# EAGLE board Training_Board (EAGLE 9.1.1)
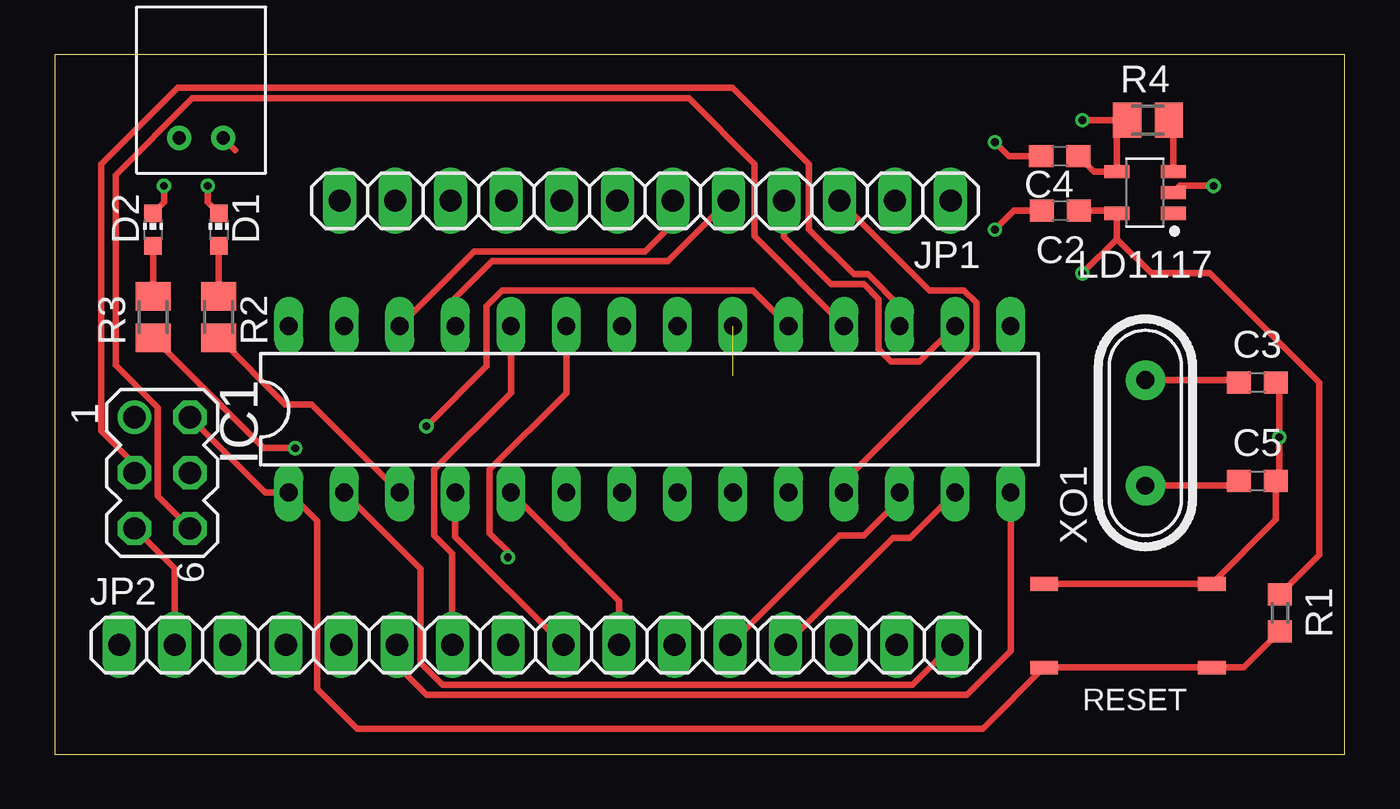
[diagram p0: board, top side]
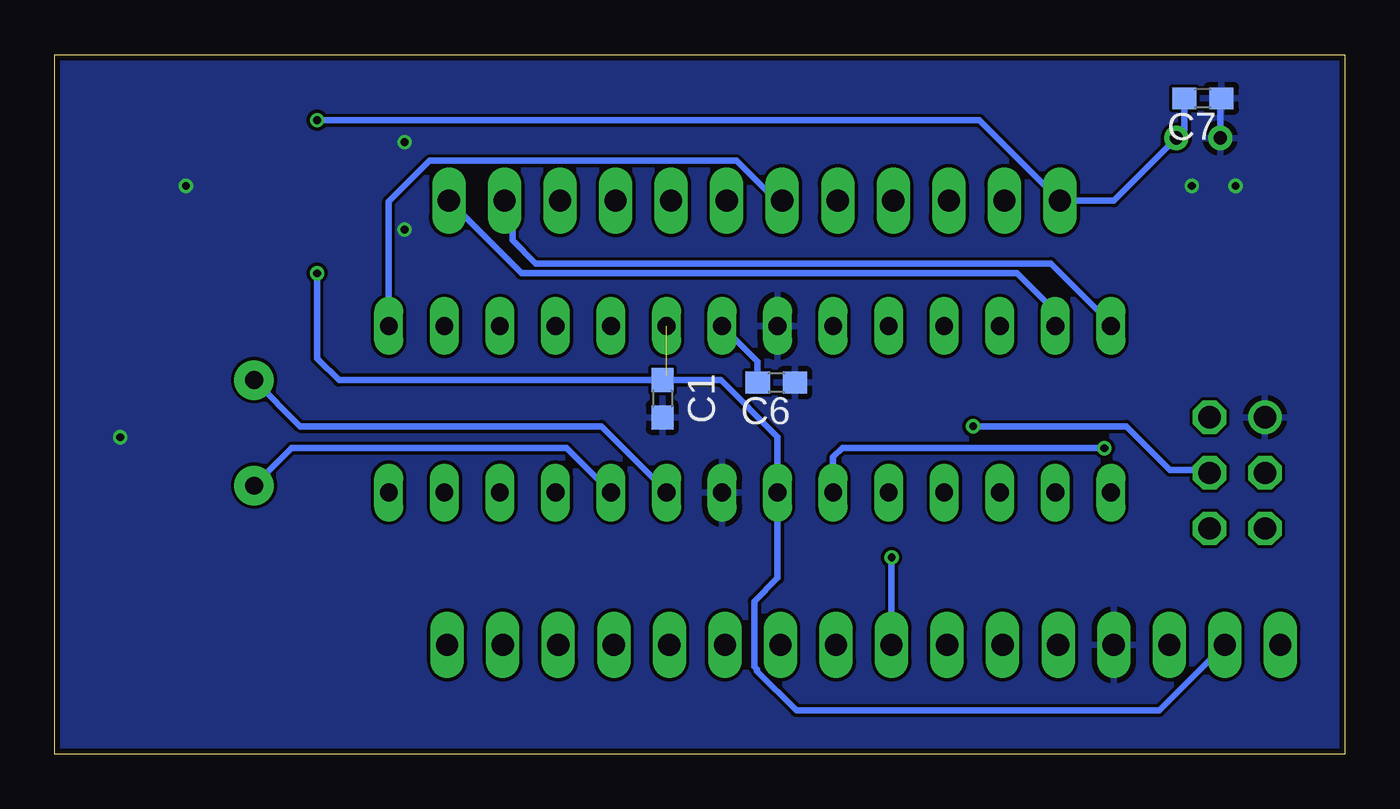
[diagram p1: board, bottom side, seen from below]

Size 59 x 32 mm. Coordinates in mm from the lower left corner, seen from the top.
Outline: 0,0 59,0 59,32 0,32 0,0
Copper layers (1*16): Top 0.035mm / dielectric 1.5mm / Bottom 0.035mm
Design rules "SeeedStudio": minimum track width 6mil, minimum drill 12mil, track to track 6mil, track to pad 6mil, pad to pad 6mil, via to via 6mil, smd to smd 0mil, copper to edge 10mil, drill to drill 10mil, minimum pad ring 10mil, minimum via ring 6mil, stop-mask expansion 2mil, vias tented up to drill 100mil, thermal gap 10mil

## Footprints (pad centres in the part's own frame; a part is rotated, then mirrored left to right if it is on the bottom)
C0603 = smd 1.1 x 1: 1 -0.85,0; 2 0.85,0
CHIP-LED0603 = smd 0.8 x 0.8: A 0,-0.75; C 0,0.75
DIL28-3 = drill 0.813 long: 1 -16.51,-3.81; 2 -13.97,-3.81; 3 -11.43,-3.81; 4 -8.89,-3.81; 5 -6.35,-3.81; 6 -3.81,-3.81; 7 -1.27,-3.81; 8 1.27,-3.81; 9 3.81,-3.81; 10 6.35,-3.81; 11 8.89,-3.81; 12 11.43,-3.81; 13 13.97,-3.81; 14 16.51,-3.81; 15 16.51,3.81; 16 13.97,3.81; 17 11.43,3.81; 18 8.89,3.81; 19 6.35,3.81; 20 3.81,3.81; 21 1.27,3.81; 22 -1.27,3.81; 23 -3.81,3.81; 24 -6.35,3.81; 25 -8.89,3.81; 26 -11.43,3.81; 27 -13.97,3.81; 28 -16.51,3.81
1X12 = drill 1.016 long: 1 -13.97,0; 2 -11.43,0; 3 -8.89,0; 4 -6.35,0; 5 -3.81,0; 6 -1.27,0; 7 1.27,0; 8 3.81,0; 9 6.35,0; 10 8.89,0; 11 11.43,0; 12 13.97,0
1X16 = drill 1.016 long: 1 -19.05,0; 2 -16.51,0; 3 -13.97,0; 4 -11.43,0; 5 -8.89,0; 6 -6.35,0; 7 -3.81,0; 8 -1.27,0; 9 1.27,0; 10 3.81,0; 11 6.35,0; 12 8.89,0; 13 11.43,0; 14 13.97,0; 15 16.51,0; 16 19.05,0
SOT95P285X110-5 = smd 1.146 x 0.597: 1 -1.287,0.95; 2 -1.287,0; 3 -1.287,-0.95; 4 1.287,-0.95; 5 1.287,0.95
MA03-2 = drill 1.016: 1 -2.54,-1.27 | drill 1.016 octagon: 2 -2.54,1.27; 3 0,-1.27; 4 0,1.27; 5 2.54,-1.27; 6 2.54,1.27
R0603 = smd 1 x 1.1: 1 -0.85,0; 2 0.85,0
M0805 = smd 1.3 x 1.6: 1 -0.95,0; 2 0.95,0
PTS645_SMD = smd 1.27 x 0.635: P$1 -3.835,1.917; P$2 3.835,1.917; P$3 3.835,-1.917; P$4 -3.835,-1.917
JST-PH = drill 0.6: 1 -1,0; 2 1,0
HC49 = drill 0.813 pad 1.8: 1 -2.413,0; 2 2.413,0

## Placement (x,y rotation side)
C1  100 nF  [C0603]  31.21,16.26 270 bottom
C2  10uF  [C0603]  45.99,24.86 180 top
C3  22 pF  [C0603]  55,17 0 top
C4  100nF  [C0603]  45.96,27.36 180 top
C5  22 pF  [C0603]  55,12.5 0 top
C6  100 nF  [C0603]  26,17 180 bottom
C7  10 nF  [C0603]  6.5,30 180 bottom
D1  RED  [CHIP-LED0603]  7.5,24 0 top
D2  GREEN  [CHIP-LED0603]  4.5,24 0 top
IC1  ATMEGA328-20P  [DIL28-3]  27.21,15.78 0 top
JP1  [1X12]  27,25.32 180 top
JP2  [1X16]  22,5 0 top
LD1117  AP2112SOT89-5  [SOT95P285X110-5]  49.86,25.69 180 top
PRGRM-HEADER  [MA03-2]  4.92,12.87 270 top
R1  10k Ohm  [R0603]  56.03,6.47 270 top
R2  1k Ohm  [M0805]  7.5,20 90 top
R3  1k Ohm  [M0805]  4.5,20 90 top
R4  10k Ohm  [M0805]  50,29 0 top
S1  PTS645PTS645_SMD1  [PTS645_SMD]  49.08,5.88 0 top
X1  JST-PH2  [JST-PH]  6.7,28.19 0 top
XO1  CRYSTALS-NOGND-HC49/4H  [HC49]  49.88,14.7 90 top

## Library data of the parts
C1 C3 C5-C7 R1 = resistor
C2 C4 = rcl; SPICEPREFIX: C
D1 D2 = led
IC1 = atmega328
JP1 JP2 = pinhead
LD1117 = RoboJackets-PowerICs
PRGRM-HEADER = con-lstb; OC_FARNELL: unknown; OC_NEWARK: unknown
R2-R4 = rcl; SPICEPREFIX: R
S1 = RoboJackets-Switches
X1 = Trainii
XO1 = IQD-Frequency-Products

## Nets
+3V3: C1.1 C2.1 IC1.7 IC1.20 JP2.2 LD1117.5 PRGRM-HEADER.5 R1.1
ECHO_3V3: IC1.13 JP2.13
GND: C1.2 C2.2 C3.2 C4.2 C5.2 C6.1 C7.1 D1.C D2.C IC1.8 IC1.22 JP2.4 LD1117.2 PRGRM-HEADER.1 S1.P$1 S1.P$2 X1.1
LED_1: IC1.3 R2.1
LED_2: IC1.6 R3.1
LEFT_A: IC1.14 JP2.6
LEFT_B: IC1.15 JP1.7
LIFT_A: IC1.16 JP1.4
LIFT_B: IC1.11 JP1.3
LINE_OUT_1: IC1.24 JP2.7
LINE_OUT_2: IC1.23 JP2.8
MISO: IC1.18 PRGRM-HEADER.6
MOSI: IC1.17 PRGRM-HEADER.3
MOTOR_FAULT: IC1.2 JP2.16
N$1: C3.1 IC1.9 XO1.2
N$2: D2.A R3.2
N$3: D1.A R2.2
N$4: C5.1 IC1.10 XO1.1
N$5: LD1117.3 R4.2
N$6: C6.2 IC1.21
RIGHT_A: IC1.26 JP1.6
RIGHT_B: IC1.25 JP1.5
RST: IC1.1 PRGRM-HEADER.2 R1.2 S1.P$3 S1.P$4
SCK: IC1.19 PRGRM-HEADER.4
SCL: IC1.28 JP1.2
SDA: IC1.27 JP1.1
TICK_LEFT: IC1.4 JP2.9
TICK_RIGHT: IC1.5 JP2.10
TRIG_3V3: IC1.12 JP2.12
VBAT: C4.1 C7.2 JP1.12 LD1117.4 R4.1 X1.2

## Tracks (layer width: path | path; a pad name or v marks a point on that pad's centre or on a via)
+3V3  (via drill 0.35)  (1 unrouted)
  Top 0.3: R1.1 57.83,9.12 57.83,16 57.83,17 52.83,22 51,22 50.15,22 48.57,23.57 | PRGRM-HEADER.5 5.49,8.49 JP2.2 | 46.98,25 C2.1 48.45,24.86 LD1117.5 48.57,23.57 | v47,22 48.57,23.57
  Bottom 0.3: 31.02,17.3 C1.1 | C1.1 46,17.11 46.95,18.05 | C1.1 28.54,17.11 25.94,14.51 IC1.7 25.94,8.06 27,7 27,4 26.87,3.87 26.87,3.8 25.08,2 8.49,2 JP2.2 | 47,18.11 46.95,18.05 | 46.95,18.05 47,18.11 | 47,18.11 v47,22
ECHO_3V3
  Top 0.3: IC1.13 39.1,9.89 38.33,9.89 JP2.13
GND  (via drill 0.35)
  Top 0.3: C3.2 56,16.85 v56,14.5 56,12.65 C5.2 55.85,10.73 S1.P$2 S1.P$1 | D2.C 5,25.25 v5,26 | D1.C 7,25.25 v7,26 | LD1117.2 51.46,26 v53,26 | C4.2 43.64,27.36 v43,28 | 44.86,24.86 C2.2 43.86,24.86 v43,24
  Bottom 0.3: C7.1 5.7,29.95 X1.1
  pour Bottom: 0,0 0,32 59,32 59,0
LED_1
  Top 0.3: R2.1 10.55,16 11.75,16 IC1.3
LED_2  (via drill 0.35)
  Top 0.3: R3.1 9.55,14 v11,14
  Bottom 0.3: v11,14 11.02,14.02 22.98,14.02 23.4,13.6 IC1.6
LEFT_A
  Top 0.3: JP2.6 15.65,4.07 17,2.72 41.72,2.72 43.72,4.72 IC1.14
LEFT_B
  Bottom 0.3: JP1.7 26,25.32 27.83,27.15 41.85,27.15 43.72,25.28 IC1.15
LIFT_A
  Top 0.3: JP1.4 33.35,23.65 35.5,21.5 37,21.5 37.68,20.82 37.68,18.53 38.24,17.97 39.56,17.97 IC1.16
LIFT_B
  Top 0.3: IC1.11 36.1,12.49 42.14,18.53 42.14,20.65 41.58,21.21 40,21.21 JP1.3
LINE_OUT_1
  Top 0.3: IC1.24 20.86,16.53 17.36,13.03 17.36,10 18.18,9.18 18.18,5.18 18.09,5.1 JP2.7
LINE_OUT_2  (via drill 0.35)
  Top 0.3: IC1.23 23.4,16.53 19.9,13.03 19.9,10.1 | v20.73,9 20.73,9.27 19.9,10.1 | 19.9,10.1
  Bottom 0.3: v20.73,9 JP2.8
MISO
  Top 0.3: IC1.18 32,23.69 32,27 29,30 6.3,30 2.79,26.49 2.79,17.79 4.71,15.87 4.71,11.81 PRGRM-HEADER.6
MOSI
  Top 0.3: PRGRM-HEADER.3 3.65,13.27 2.13,14.78 2.13,27 5.63,30.5 31,30.5 34.5,27 34.5,24 36.55,21.95 37.19,21.95 38.64,20.5 IC1.17
MOTOR_FAULT
  Top 0.3: JP2.16 39.22,3.17 17.75,3.17 16.74,4.18 16.74,8.47 IC1.2
N$1
  Top 0.3: XO1.2 54.04,17.11 C3.1
  Bottom 0.3: XO1.2 47.77,15 34,15 31.02,12.02 IC1.9
N$2
  Top 0.3: R3.2 D2.A
N$3
  Top 0.3: D1.A R2.2
N$4
  Top 0.3: XO1.1 53.94,12.29 C5.1
  Bottom 0.3: IC1.10 35.59,14 48.17,14 XO1.1
N$5
  Top 0.3: R4.2 51.15,28.8 LD1117.3
N$6
  Bottom 0.3: IC1.21 26.85,17.96 C6.2
RIGHT_A
  Top 0.3: JP1.6 28.27,24.27 27,23 19.19,23 IC1.26
RIGHT_B
  Top 0.3: JP1.5 28.04,22.55 20,22.55 18.32,20.87 IC1.25
RST
  Top 0.3: R1.2 54.37,3.96 S1.P$3 S1.P$4 42.45,1.17 13.83,1.17 12,3 12,10.67 IC1.1 9.63,11.97 PRGRM-HEADER.2
SCK  (via drill 0.35)
  Top 0.3: IC1.19 31.94,21.21 20.46,21.21 19.75,20.5 19.75,17.75 v17,15
  Bottom 0.3: v17,15 10,15 8,13 6.32,13 PRGRM-HEADER.4
SCL
  Bottom 0.3: JP1.2 38.05,24.95 38.05,23.51 37,22.45 13.45,22.45 10.7,19.7 IC1.28
SDA
  Bottom 0.3: JP1.1 37.65,22 15,22 13.24,20.24 IC1.27
TICK_LEFT
  Top 0.3: IC1.4 18.32,10 18.32,9.95 JP2.9
TICK_RIGHT
  Top 0.3: IC1.5 25.81,7.02 JP2.10
TRIG_3V3
  Top 0.3: IC1.12 38.64,11.64 37,10 35.89,10 JP2.12
VBAT  (via drill 0.35)
  Top 0.3: X1.2 8.25,27.64 | v47,29 R4.1 48.57,28.52 LD1117.4 47.53,26.64 C4.1
  Bottom 0.3: v47,29 16.71,29 JP1.12 10.57,25.32 X1.2 7.35,28.54 C7.2

## Text on the board
tPlace: RESET